# EAGLE board SpectroSlave (EAGLE 7.1.0)
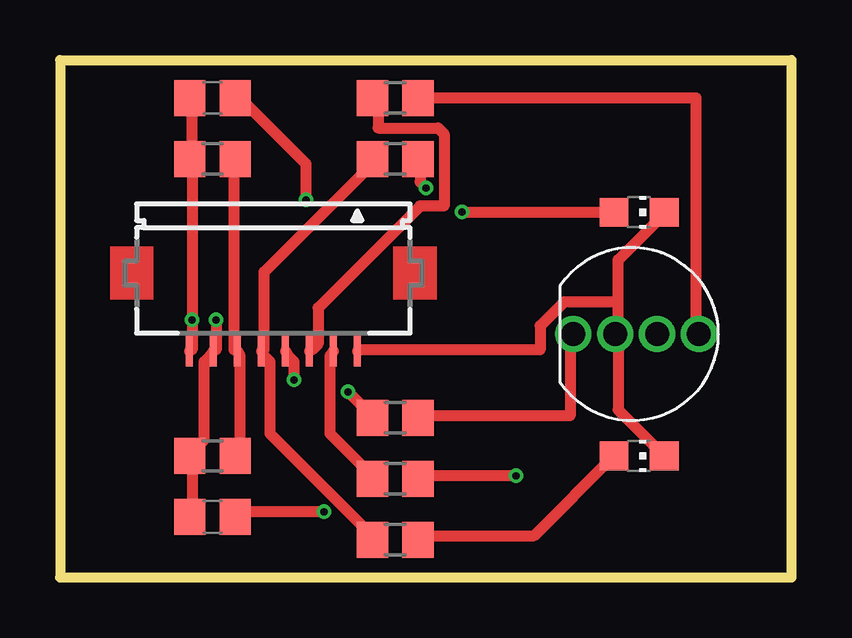
[diagram p0: board, top side]
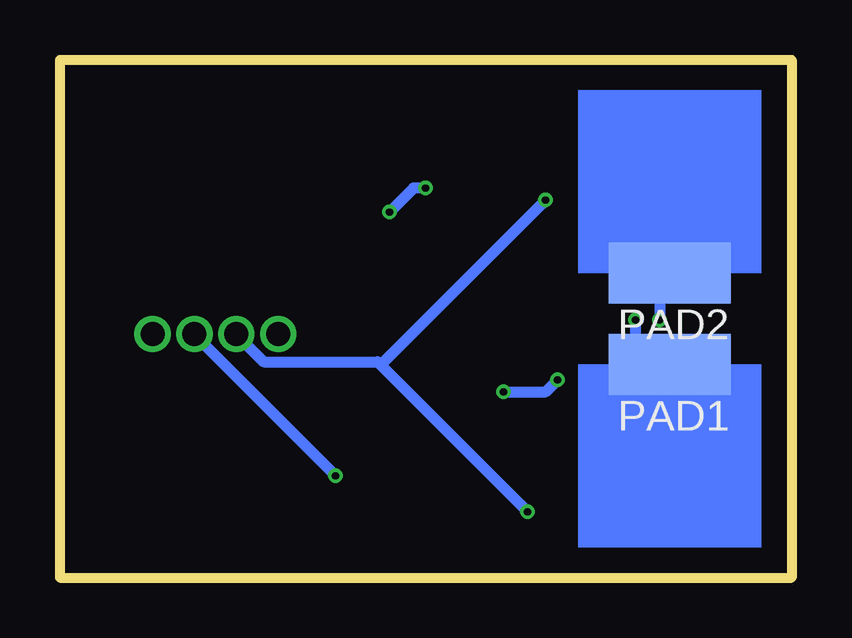
[diagram p1: board, bottom side, seen from below]

Size 30.48 x 21.59 mm. Coordinates in mm from the lower left corner, seen from the top.
Outline: 0,21.59 30.48,21.59 30.48,0 0,0 0,21.59
Copper layers (1*16): Top 0.035mm / dielectric 1.5mm / Bottom 0.035mm
Design rules "Fusion_eagle_rule_v1.1": minimum track width 6mil, minimum drill 12mil, track to track 6mil, track to pad 6mil, pad to pad 6mil, via to via 6mil, smd to smd 0mil, copper to edge 10mil, drill to drill 10mil, minimum pad ring 10mil, minimum via ring 6mil, stop-mask expansion 2mil, vias tented up to drill 100mil, thermal gap 10mil
Net classes: 0 default: width 0.457 mm; 1 power: width 0.457 mm; 2 VIN: width 0.457 mm; 3 fine: width 0.457 mm; 4 aref: width 0.457 mm
vRestrict: area 1.3,1.3 to 8.9,8.9; area 1.3,12.7 to 8.9,20.3

## Footprints (pad centres in the part's own frame; a part is rotated, then mirrored left to right if it is on the bottom)
C0805 = smd 1.3 x 1.5: 1 -0.95,0; 2 0.95,0
CHIP-LED0805 = smd 1.2 x 1.2: A 0,-1.05; C 0,1.05
SMD2,54-5,08 = smd 2.54 x 5.08: 1 0,0
R0805 = smd 1.3 x 1.5: 1 -0.95,0; 2 0.95,0
LED-TRICOLOR-THROUGHHOLE = drill 1: BLU 2.492,0; GND -1,0; GRN 0.746,0; RED -2.746,0
FH12-08S-1SH = smd 0.3 x 1.3: 1 -3.5,3.25; 2 -2.5,3.25; 3 -1.5,3.25; 4 -0.5,3.25; 5 0.5,3.25; 6 1.5,3.25; 7 2.5,3.25; 8 3.5,3.25

## Placement (x,y rotation side)
C1  100pF  [C0805]  6.35,20 0 top
C2  100pF  [C0805]  6.35,2.54 0 top
LED1  WHITE  [CHIP-LED0805]  24.13,5.08 270 top
LED5  WHITE  [CHIP-LED0805]  24.13,15.24 270 top
PAD1  [SMD2,54-5,08]  5.08,8.89 90 bottom
PAD2  [SMD2,54-5,08]  5.08,12.7 90 bottom
RL1  1M  [R0805]  6.35,17.46 180 top
RL2  150  [R0805]  13.97,6.67 180 top
RL3  100  [R0805]  13.97,20 180 top
RL4  150  [R0805]  13.97,4.13 0 top
RL5  100  [R0805]  13.97,17.46 180 top
RL6  100  [R0805]  13.97,1.59 180 top
RL7  1M  [R0805]  6.35,5.08 180 top
U$1  RGB-COMMON-CATHODE  [LED-TRICOLOR-THROUGHHOLE]  24.13,10.16 0 top
X1  FH12-08S-1SH  [FH12-08S-1SH]  8.89,12.7 180 top

## Library data of the parts
C1 C2 RL1-RL7 = rcl
LED1 LED5 = led
PAD1 PAD2 = wirepad
U$1 = lpatiny
X1 = con-hirose; OC_FARNELL: unknown; OC_NEWARK: unknown

## Nets
BLUE: RL2.2 X1.4
GND [power]: C1.2 C2.2 LED1.C LED5.C U$1.GND X1.1
GREEN: RL3.2 X1.3
N$1: RL4.2 U$1.GRN
N$2: RL3.1 U$1.BLU
N$3: RL2.1 U$1.RED
N$4: LED5.A RL5.1
N$5: LED1.A RL6.1
PULSE: RL1.1 RL7.1 X1.6
RED: RL4.1 X1.2
SENS1: C2.1 PAD1.1 RL7.2 X1.7
SENS2: C1.1 PAD2.1 RL1.2 X1.8
WHITE: RL5.2 RL6.2 X1.5

## Tracks (layer width: path | path; a pad name or v marks a point on that pad's centre or on a via)
BLUE  (via drill 0.3)
  Top 0.457: v9.75,8.25 9.75,9 9.5,9.25 X1.4 | v12,7.75 13,6.75 RL2.2
  Bottom 0.457: v9.75,8.25 10.25,7.75 v12,7.75
GND  (via drill 0.3)
  Top 0.457: LED1.C 25,5.25 23.25,7 23.25,10 U$1.GND 23.25,10.25 23.25,11.5 | 23.25,11.5 23.25,13.25 25,15 LED5.C | 23.25,11.5 21,11.5 20,10.5 20,9.5 12.5,9.5 X1.1 | v11,2.75 7.5,2.75 C2.2 | v10.25,15.75 10.25,17.25 7.5,20 C1.2
  Bottom 0.457: 17.12,8.88 17.25,9 22,9 23,10 U$1.GND | 17.12,8.88 v11,2.75 | 17.12,8.88 v10.25,15.75
GREEN
  Top 0.457: X1.3 10.5,9.5 10.75,9.75 10.75,11.25 15,15.5 16,15.5 16,18.5 15.75,18.75 13.25,18.75 13.25,20 RL3.2
N$1  (via drill 0.3)
  Top 0.457: v19,4.25 15,4.25 RL4.2
  Bottom 0.457: v19,4.25 24.75,10 U$1.GRN
N$2
  Top 0.457: RL3.1 15,20 26.5,20 26.5,10.25 U$1.BLU
N$3
  Top 0.457: RL2.1 15,6.75 21.25,6.75 21.25,10 U$1.RED
N$4  (via drill 0.3)
  Top 0.457: v16.75,15.25 23,15.25 LED5.A | v15.25,16.25 15,16.5 15,17.25 RL5.1
  Bottom 0.457: v16.75,15.25 15.75,16.25 v15.25,16.25
N$5
  Top 0.457: LED1.A 19.75,1.75 15,1.75 RL6.1
PULSE
  Top 0.457: RL7.1 7.5,5.25 7.5,9.25 X1.6 7.25,9.5 7.25,17.25 RL1.1
RED
  Top 0.457: X1.2 11.25,9.25 11.25,6 13,4.25 RL4.1
SENS1  (via drill 0.3)
  Top 0.457: C2.1 5.5,2.75 5.5,5 RL7.2 5.5,5.25 6,5.75 6,9 6.25,9.25 X1.7 6.5,9.5 v6.5,10.75
  Bottom 0.457: v6.5,10.75 6.5,9 5.25,9 PAD1.1
SENS2  (via drill 0.3)
  Top 0.457: X1.8 5.5,9.5 v5.5,10.75 5.5,17.25 RL1.2 5.5,17.5 5.5,20 C1.1
  Bottom 0.457: v5.5,10.75 5.5,12.5 5.25,12.5 PAD2.1
WHITE
  Top 0.457: RL6.2 13,1.75 8.75,6 8.75,9 8.5,9.25 X1.5 8.5,9.5 8.5,12.75 13,17.25 RL5.2
(copper drawn outside any net)
  shapes: Bottom area x2

## Text on the board
203bmp: C:/Users/G/Pictures/logo_epfl.bmp